# Altium PCB MOSFET_Switch_Serial.PcbDoc
Units mil, origin at the board's own origin, x right, y up, seen from the top; angles counter-clockwise.
Board outline 2025 x 1100 mil, 2 copper layers (Top Layer, Bottom Layer); 38 components, 102 nets, 89 pads, 11 vias.
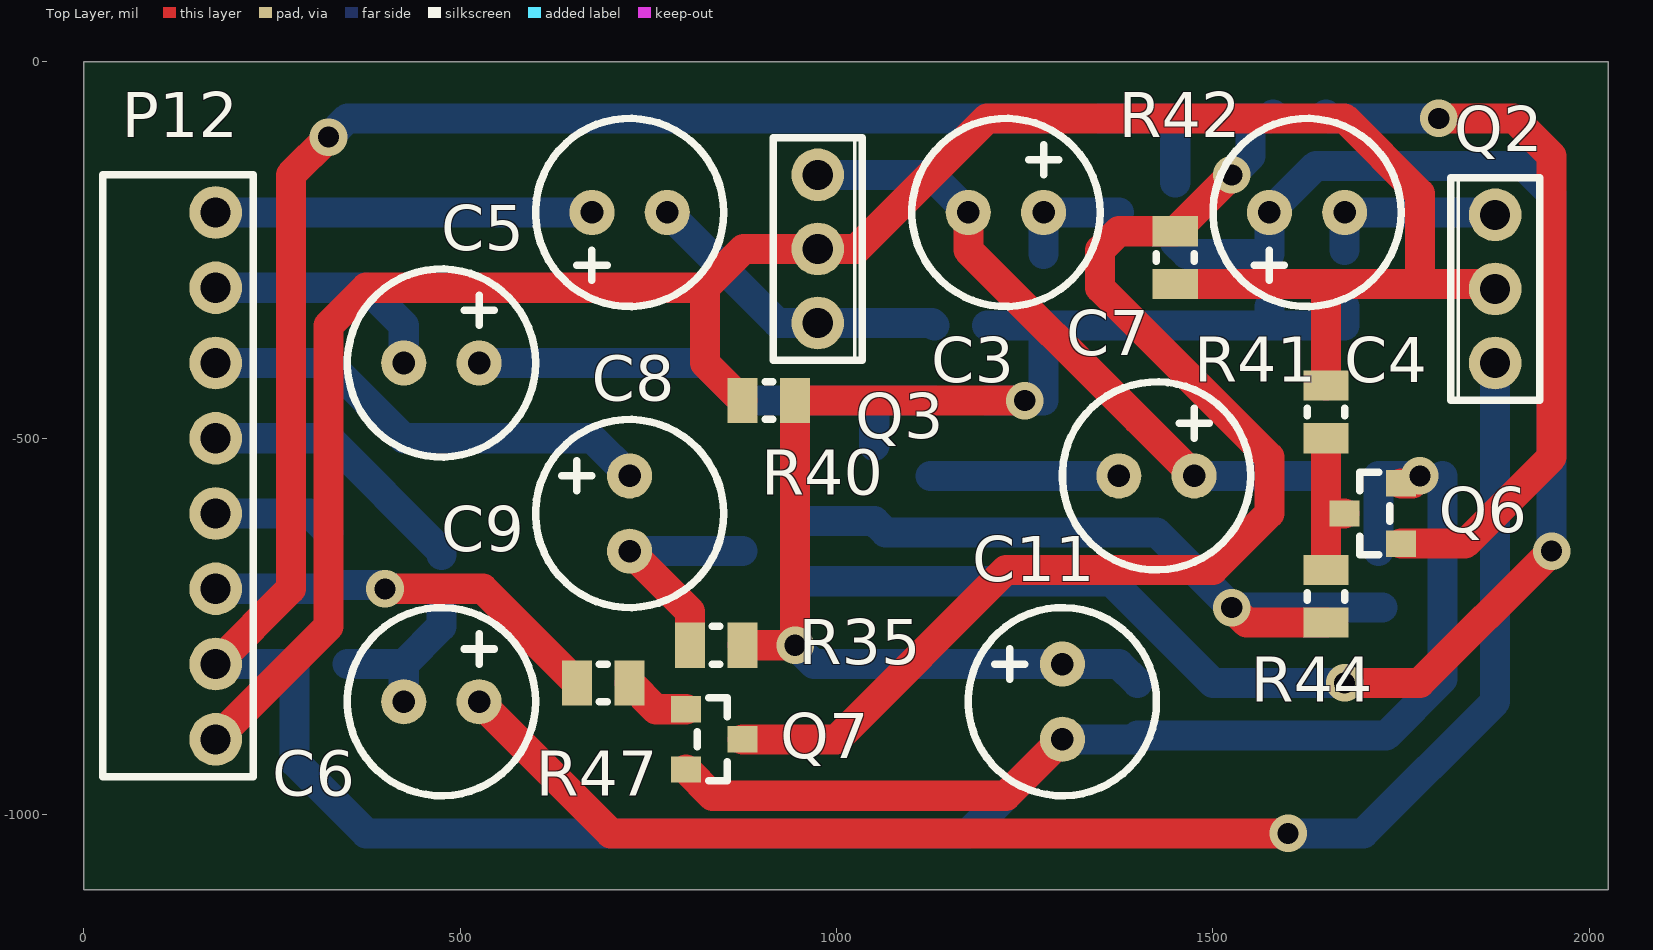
[diagram p0: Top Layer view]
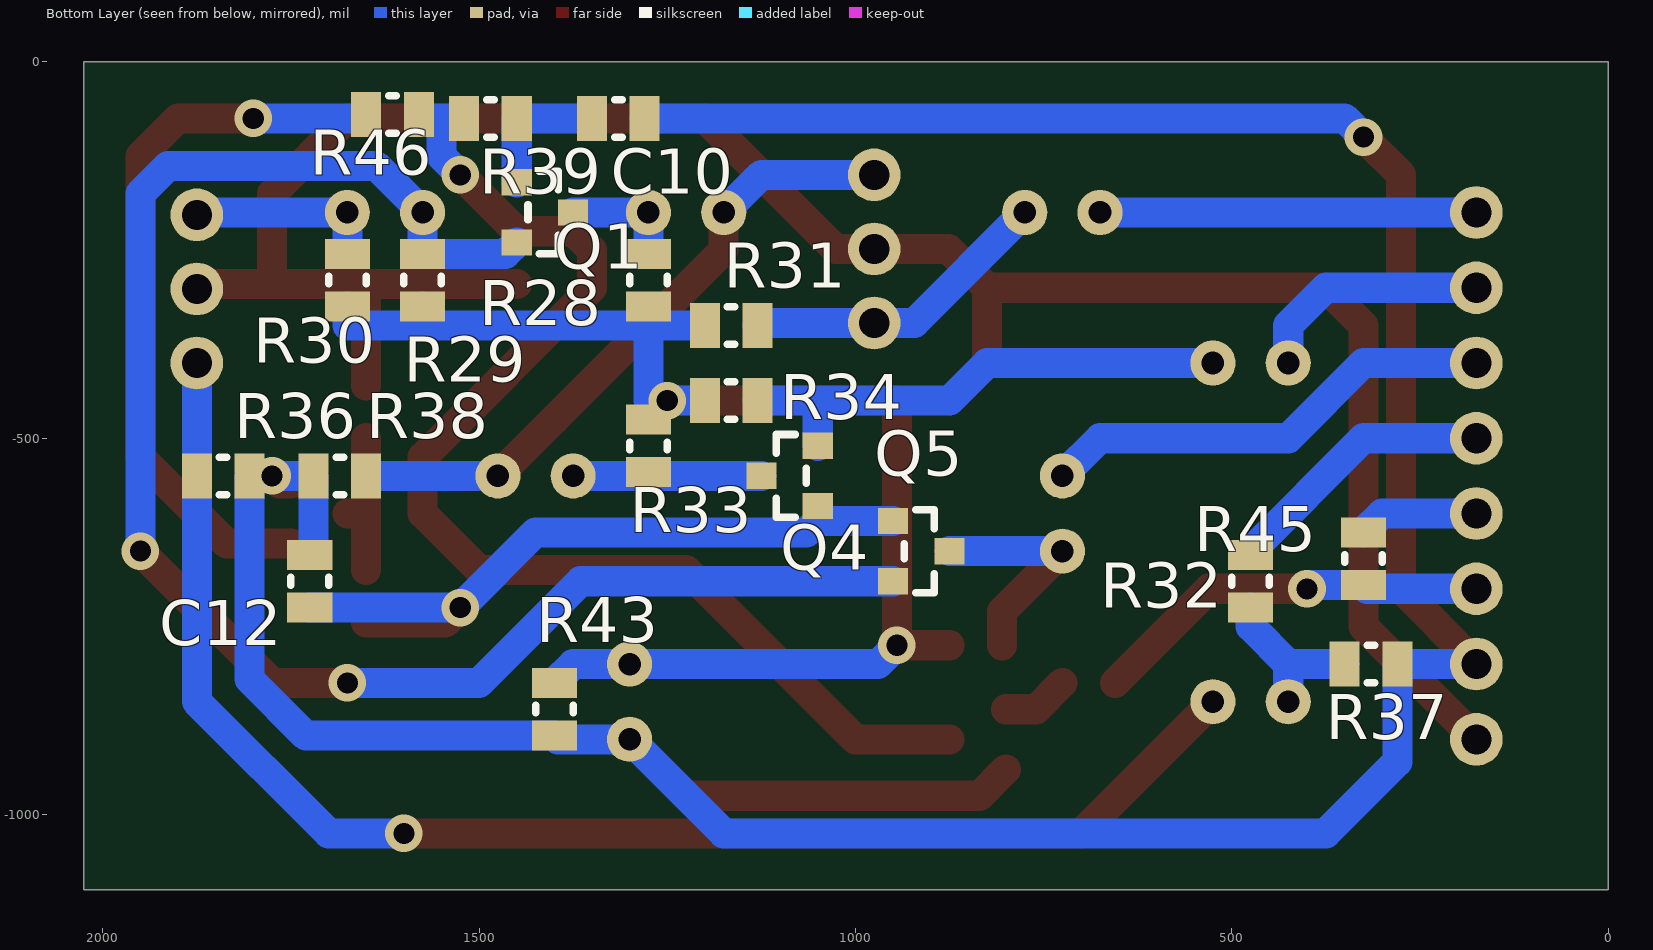
[diagram p1: Bottom Layer view, seen from below]
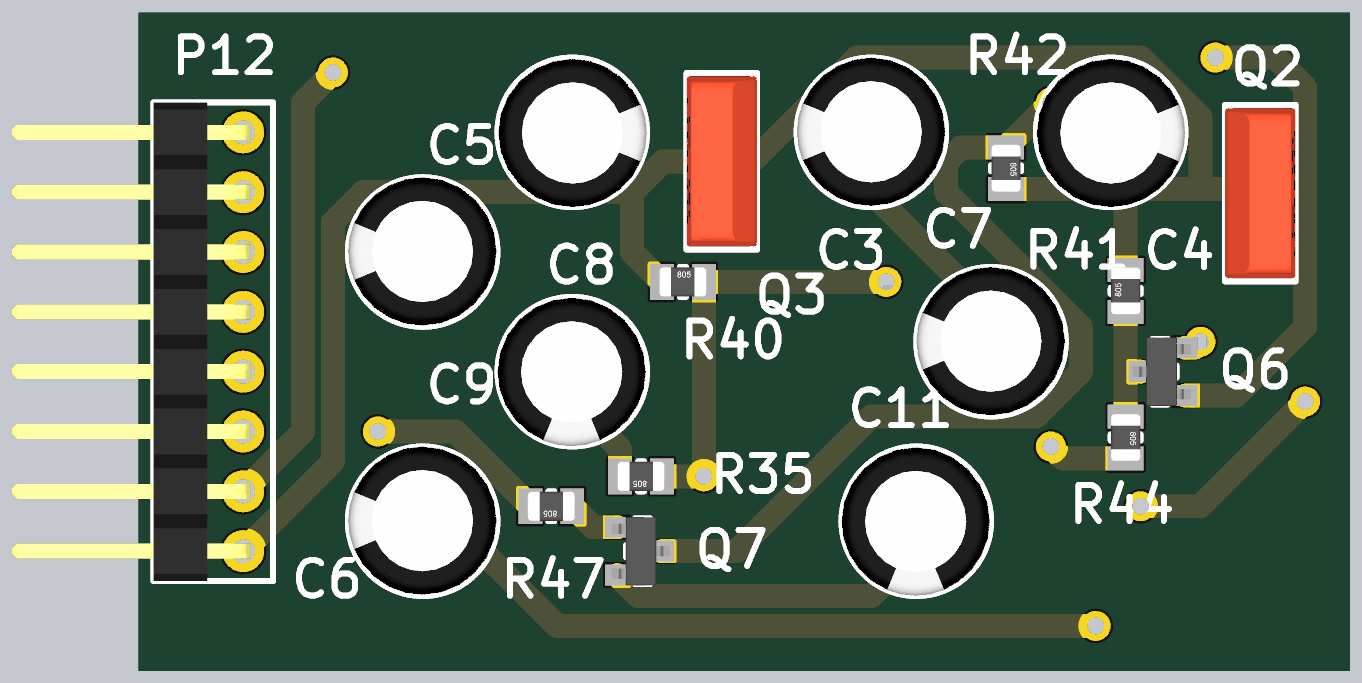
[diagram p2: 3D render of the assembled board from above, using the file's embedded part models]
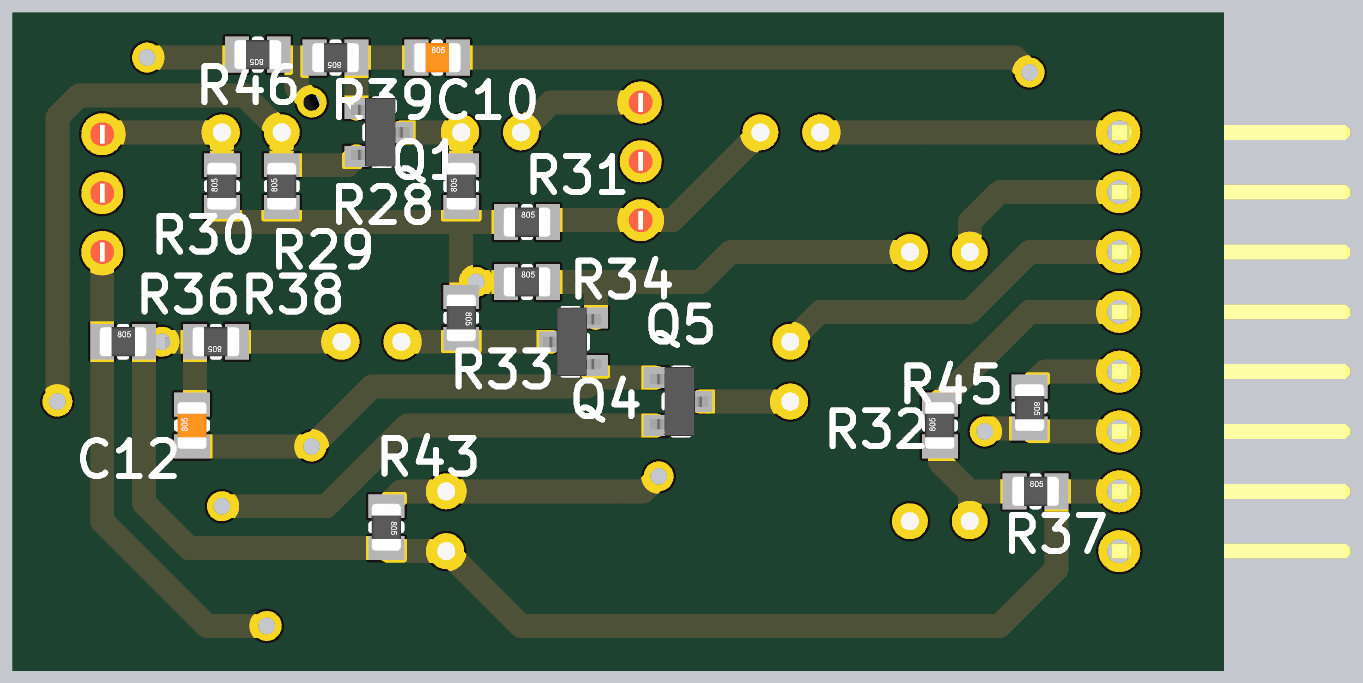
[diagram p3: 3D render of the assembled board from below, using the file's embedded part models]

## Layer stack, top to bottom
Top Solder: solder mask 0.4, Solder Resist, Dk 3.5
Top Layer: signal copper 1.4
Dielectric 1: dielectric 12.6, FR-4, Dk 4.8
Bottom Layer: signal copper 1.4
Bottom Solder: solder mask 0.4, Solder Resist, Dk 3.5

## Board outline
0,-1100 0,0 2025,0 2025,-1100

## Design rules (kind name [scope] priority, off if disabled: settings)
Clearance [All] p1: gap=10
PolygonConnect [All] p1: connectstyle=Relief reliefconductorwidth=10 reliefentries=4 polygonreliefangle="90 Angle" airgapwidth=10
RoomDefinition MOSFET_Switch_Serial [InComponentClass('MOSFET_Switch_Serial')] p1 off: confinementstyle=ConfineIn formatcopy=TRUE lockcomponents=FALSE outline 25,-1075 2000,-1075 2000,-25 25,-25
RoutingVias [All] p1: holewidth=28 width=50 viastyle="Through Hole" minholewidth=28 minwidth=50 maxholewidth=28 maxwidth=50
SilkToBoardRegionClearance [All] p1 off:
SolderMaskExpansion [All] p1: expansion=4
Width [All] p1: maxlimit=80 minlimit=40 preferedwidth=40
28 further rules are at their usual default settings.

## Components (designator, comment, footprint, x,y, rotation, side; value= is the part's Value field where it differs from the comment)
C3 "Electrolytic Capacitor" ELEC_RAD10 1275,-200 r180 top
C4 "Electrolytic Capacitor" ELEC_RAD10 1575,-200 r0 top
C5 "Electrolytic Capacitor" ELEC_RAD10 675,-200 r0 top
C6 "Electrolytic Capacitor" ELEC_RAD10 525,-850 r180 top
C7 "Electrolytic Capacitor" ELEC_RAD10 1475,-550 r180 top
C8 "Electrolytic Capacitor" ELEC_RAD10 525,-400 r180 top
C9 "Electrolytic Capacitor" ELEC_RAD10 725,-550 r270 top
C10 "Capacitor" 0805_Capacitor 1275,-75 r270 bottom
C11 "Electrolytic Capacitor" ELEC_RAD10 1300,-800 r270 top
C12 "Capacitor" 0805_Capacitor 1725,-650 r180 bottom
P12 "SIL-CONN-8" SIL-CONN-8-R1 175,-200 r0 top
Q1 "2N7002" SOT23-3 1375,-200 r270 bottom
Q2 "KT315" KT315 1875,-400 r90 top
Q3 "KT315" KT315 975,-150 r270 top
Q4 "2N7002" SOT23-3 1125,-550 r90 bottom
Q5 "2N7002" SOT23-3 875,-650 r270 bottom
Q6 "2N7002" SOT23-3 1675,-600 r90 top
Q7 "2N7002" SOT23-3 875,-900 r270 top
R28 "Resistor" 0805_Resistor 1275,-250 r180 bottom
R29 "Resistor" 0805_Resistor 1575,-250 r180 bottom
R30 "Resistor" 0805_Resistor 1675,-250 r180 bottom
R31 "Resistor" 0805_Resistor 1125,-350 r270 bottom
R32 "Resistor" 0805_Resistor 475,-650 r180 bottom
R33 "Resistor" 0805_Resistor 1275,-550 r0 bottom
R34 "Resistor" 0805_Resistor 1125,-450 r270 bottom
R35 "Resistor" 0805_Resistor 800,-775 r90 top
R36 "Resistor" 0805_Resistor 1800,-550 r270 bottom
R37 "Resistor" 0805_Resistor 275,-800 r270 bottom
R38 "Resistor" 0805_Resistor 1725,-550 r90 bottom
R39 "Resistor" 0805_Resistor 1525,-75 r90 bottom
R40 "Resistor" 0805_Resistor 950,-450 r270 top
R41 "Resistor" 0805_Resistor 1650,-425 r0 top
R42 "Resistor" 0805_Resistor 1450,-300 r180 top
R43 "Resistor" 0805_Resistor 1400,-900 r0 bottom
R44 "Resistor" 0805_Resistor 1650,-750 r180 top
R45 "Resistor" 0805_Resistor 325,-700 r0 bottom
R46 "Resistor" 0805_Resistor 1655,-70 r90 bottom
R47 "Resistor" 0805_Resistor 650,-825 r90 top

## Footprints (in the part's own frame and the unit in brackets; to place one, negate y for a bottom-side part, rotate by r counter-clockwise, add the part's x,y. Pads: shape width x height; smd on the part's side, far side on the other; paste and mask are expansions set on the pad)
0805_Capacitor [mil]
  rect 60x40 smd: 1(0,-5) 2(0,-75)
  silkscreen extent -25,-45 25,-35, body extent -25,-79 25,-1, height 31
0805_Resistor [mil]
  rect 60x40 smd: 1(0,-5) 2(0,-75)
  silkscreen extent -25,-45 25,-35, body extent -25,-79 25,-1, height 31
ELEC_RAD10 [mil]
  round 60 hole 30: +(0,0) -(100,0)
  silkscreen extent -75,-125 175,125, body extent -74,-125 174,123, height 433
KT315 [mil]
  round 70 hole 40: 1(0,0) 2(98.43,0) 3(196.85,0)
  silkscreen extent -49,-59 246,59, body extent -43,-59 240,59, height 256
SIL-CONN-8-R1 [mil]
  round 70 hole 40: 1(0,0) 2(0,-100) 3(0,-200) 4(0,-300) 5(0,-400) 6(0,-500) 7(0,-600) 8(0,-700)
  silkscreen extent -150,-750 50,50, body extent -386,-750 13,50, height 99
SOT23-3 [mil]
  rect 35x40 smd: 1(0,0) 2(-40,-75) 3(40,-75)
  silkscreen extent -55,-60 55,-20, body extent -57,-84 57,13, height 39

## Via types
v1: diameter 50, hole 28, Top Layer to Bottom Layer, 11 vias

## Nets (pads, with @x,y where several pads share a name; then routed paths per layer and width w, separated by ;. In a path a pad name is that pad's centre, name@x,y a point inside that pad or via, vN(x,y) a via of type N, cw(c..) or ccw(c..) an arc to the next point about the centre after c; other vN are vias at no path point)
CTRL: P12.6 R45.1 R47.1 | length 535.9
  Top Layer w40: v1(400,-700) 530,-700 R47.1
  Bottom Layer w40: P12.6 320,-700 R45.1 395,-695 v1(400,-700)
DS: 
ENC1: 
ENC2: 
I2C_SCK: 
I2C_SDA: 
IN: C5.+ P12.1 | length 500
  Bottom Layer w40: P12.1 C5.+
KBD: 
M\R\1: 
M\R\2: 
MODE: 
MOSI: 
NetC3_+: C3.+ Q1.1 R28.1 | length 155
  Bottom Layer w40: R28.1 C3.+ Q1.1
NetC3_-: C3.- C7.+ Q3.1 R38.2 | length 870
  Top Layer w40: C3.- 1175,-250 1400,-475 C7.+
  Bottom Layer w40: Q3.1 1125,-150 C3.- ; C7.+ R38.2
NetC4_+: C4.+ Q1.3 Q5.3 R29.1 | length 2205.5
  Top Layer w40: v1(1675,-825) 1775,-825 v1(1950,-650)
  Bottom Layer w40: Q5.3 1365,-690 1500,-825 v1(1675,-825) ; Q1.3 1465,-255 R29.1 C4.+ 1636.85,-138.15 1913.15,-138.15 1950,-175 v1(1950,-650)
NetC4_-: C4.- Q2.3 R30.1 | length 246.9
  Bottom Layer w40: R30.1@1675,-250 C4.- Q2.3@1871.85,-200
NetC5_-: C5.- Q3.3 R31.1 | length 417.1
  Bottom Layer w40: C5.- 921.85,-346.85 Q3.3 1126.85,-346.85 R31.1
NetC6_+: C6.+ Q2.1 R36.2 | length 1945
  Top Layer w40: C6.+ 700,-1025 v1(1600,-1025)
  Bottom Layer w40: v1(1600,-1025) 1700,-1025 1875,-850 R36.2 Q2.1
NetC6_-: C6.- R32.2 R37.2 | length 220.7
  Bottom Layer w40: R37.2 425,-800 ; C6.- 425,-800 ; R32.2 475,-750 425,-800
NetC7_-: C7.- Q4.1 R33.1 | length 250
  Bottom Layer w40: Q4.1 C7.-
NetC8_+: C8.+ Q4.3 R34.1 | length 685.7
  Bottom Layer w40: C8.+ 825,-400 875,-450 1050,-450 ; Q4.3 1050,-450 ; R34.1 1050,-450
NetC9_-: C9.- Q5.1 R35.1 | length 308.1
  Top Layer w40: C9.- 805,-730 R35.1
  Bottom Layer w40: C9.- Q5.1
NetC10_2: C10.2 Q1.2 R39.2 | length 185
  Bottom Layer w40: C10.2 R39.2 Q1.2
NetC12_2: C12.2 Q4.2 Q5.2 R44.1 | length 955.9
  Top Layer w40: v1(1525,-725) 1545,-745 R44.1
  Bottom Layer w40: Q5.2 1050,-610 1065,-625 1425,-625 v1(1525,-725) C12.2
NetD1_A: 
NetD1_K: 
NetD2_A: 
NetD2_K: 
NetD3_A: 
NetD3_K: 
NetD4_A: 
NetD4_K: 
NetD5_A: 
NetD5_K: 
NetD6_A: 
NetD6_K: 
NetD7_A: 
NetD7_K: 
NetD8_A: 
NetD8_K: 
NetD9_A: 
NetD9_K: 
NetD10_A: 
NetD10_K: 
NetD11_A: 
NetD11_K: 
NetD12_A: 
NetD12_K: 
NetP1_1: 
NetP1_2: 
NetP1_3: 
NetP1_4: 
NetP1_5: 
NetP1_6: 
NetP9_1: 
NetP9_2: 
NetP9_3: 
NetP9_4: 
NetP9_5: 
NetP9_6: 
NetP10_1: 
NetP10_2: 
NetP10_3: 
NetP10_4: 
NetP10_5: 
NetP10_6: 
NetQ6_D: Q6.1 R41.2 R44.2 | length 200
  Top Layer w40: R44.2 1650,-600 ; R41.2 1650,-600 ; Q6.1 1650,-600
NetQ6_G: Q6.2 R46.1 | length 970.4
  Top Layer w40: Q6.2 1835,-640 1950,-525 1950,-125 1900,-75 v1(1800,-75)
  Bottom Layer w40: R46.1 1655,-75 v1(1800,-75)
NetQ7_D: Q7.1 R39.1 R42.2 R46.2 | length 1631.3
  Top Layer w40: Q7.1 1000,-900 1225,-675 1500,-675 1575,-600 1575,-525 1350,-300 1350,-250 1375,-225 R42.2 v1(1525,-150)
  Bottom Layer w40: R39.1 1550,-75 ; v1(1525,-150) 1550,-125 1550,-75 ; R46.2 1575,-75 1550,-75
NetQ7_G: Q7.2 R47.2 | length 89.5
  Top Layer w40: R47.2 760,-860 Q7.2
NetR13_2: 
NetR14_2: 
NetR15_2: 
NetR16_2: 
NetR17_2: 
NetR18_2: 
NetR19_2: 
NetR20_2: 
NetR21_2: 
NetR22_2: 
NetR24_2: 
NetR25_2: 
NetR26_1: 
NetR26_2: 
NetU3_9: 
NetU5_4: 
NetU5_9: 
NetU6_9: 
O\E\: C10.1 C11.- C12.1 P12.7 Q6.3 Q7.3 R36.1 R37.1 R38.1 R43.1 | length 4597.3
  Top Layer w40: P12.7 275,-700 275,-150 v1(325,-100) ; Q7.3 835,-975 1225,-975 C11.- ; Q6.3 Q6.3@1765,-560
  Bottom Layer w40: P12.7 R37.1 280,-930 375,-1025 1175,-1025 C11.- 1395,-900 R43.1 1730,-895 1805,-820 R36.1 ; v1(325,-100) 350,-75 C10.1 ; C12.1@1720,-650 R38.1 v1(1775,-550)
OUT: P12.4 R32.1 | length 367.1
  Bottom Layer w40: P12.4 325,-500 475,-650 R32.1
PULL-UP: P12.5 R45.2 | length 160.4
  Bottom Layer w40: P12.5 300,-600 R45.2
R\E\S\E\T\: 
RETURN: C9.+ P12.3 | length 612.1
  Bottom Layer w40: P12.3 325,-400 425,-500 675,-500 C9.+
RST: 
SCK: 
SEND: C8.- P12.2 | length 320.7
  Bottom Layer w40: P12.2 375,-300 425,-350 C8.-
ST: 
UART_RX: 
VCC: P12.8 Q2.2 Q3.2 R40.2 R41.1 R42.1 | length 3070.9
  Top Layer w40: P12.8 325,-750 325,-350 375,-300 825,-300 ; R40.2 825,-400 825,-300 ; R42.1 1650,-295 ; R41.1 1650,-295 ; Q2.2 1868.43,-295 1775,-295 ; 825,-300 876.57,-248.43 Q3.2 1026.57,-248.43 1200,-75 1675,-75 1775,-175 1775,-295 ; 1650,-295 1775,-295
VCC/2: C11.+ R28.2 R29.2 R30.2 R31.2 R33.2 R34.2 R35.2 R40.1 R43.2 | length 1875.7
  Top Layer w40: R35.2 v1(945,-775) R40.1 v1(1250,-450)
  Bottom Layer w40: v1(945,-775) 970,-800 C11.+ 1375,-800 R43.2 ; R34.2 v1(1250,-450) 1275,-450 1275,-350 ; R31.2 1275,-350 ; R29.2 1575,-350 ; R30.2 1675,-350 1575,-350 ; 1275,-350 1575,-350
X1: 
X2: 

## Silkscreen, mask and mechanical layers (free items; w line width, h text height)
Mechanical 1:
  the board outline again, w10